# Altium PCB zhuanjie.PcbDoc
Units mm, origin at the board's own origin, x right, y up, seen from the top; angles counter-clockwise.
Board outline 37.21 x 32 mm, 2 copper layers (Top Layer, Bottom Layer); 14 components, 57 nets, 120 pads, 4 vias.
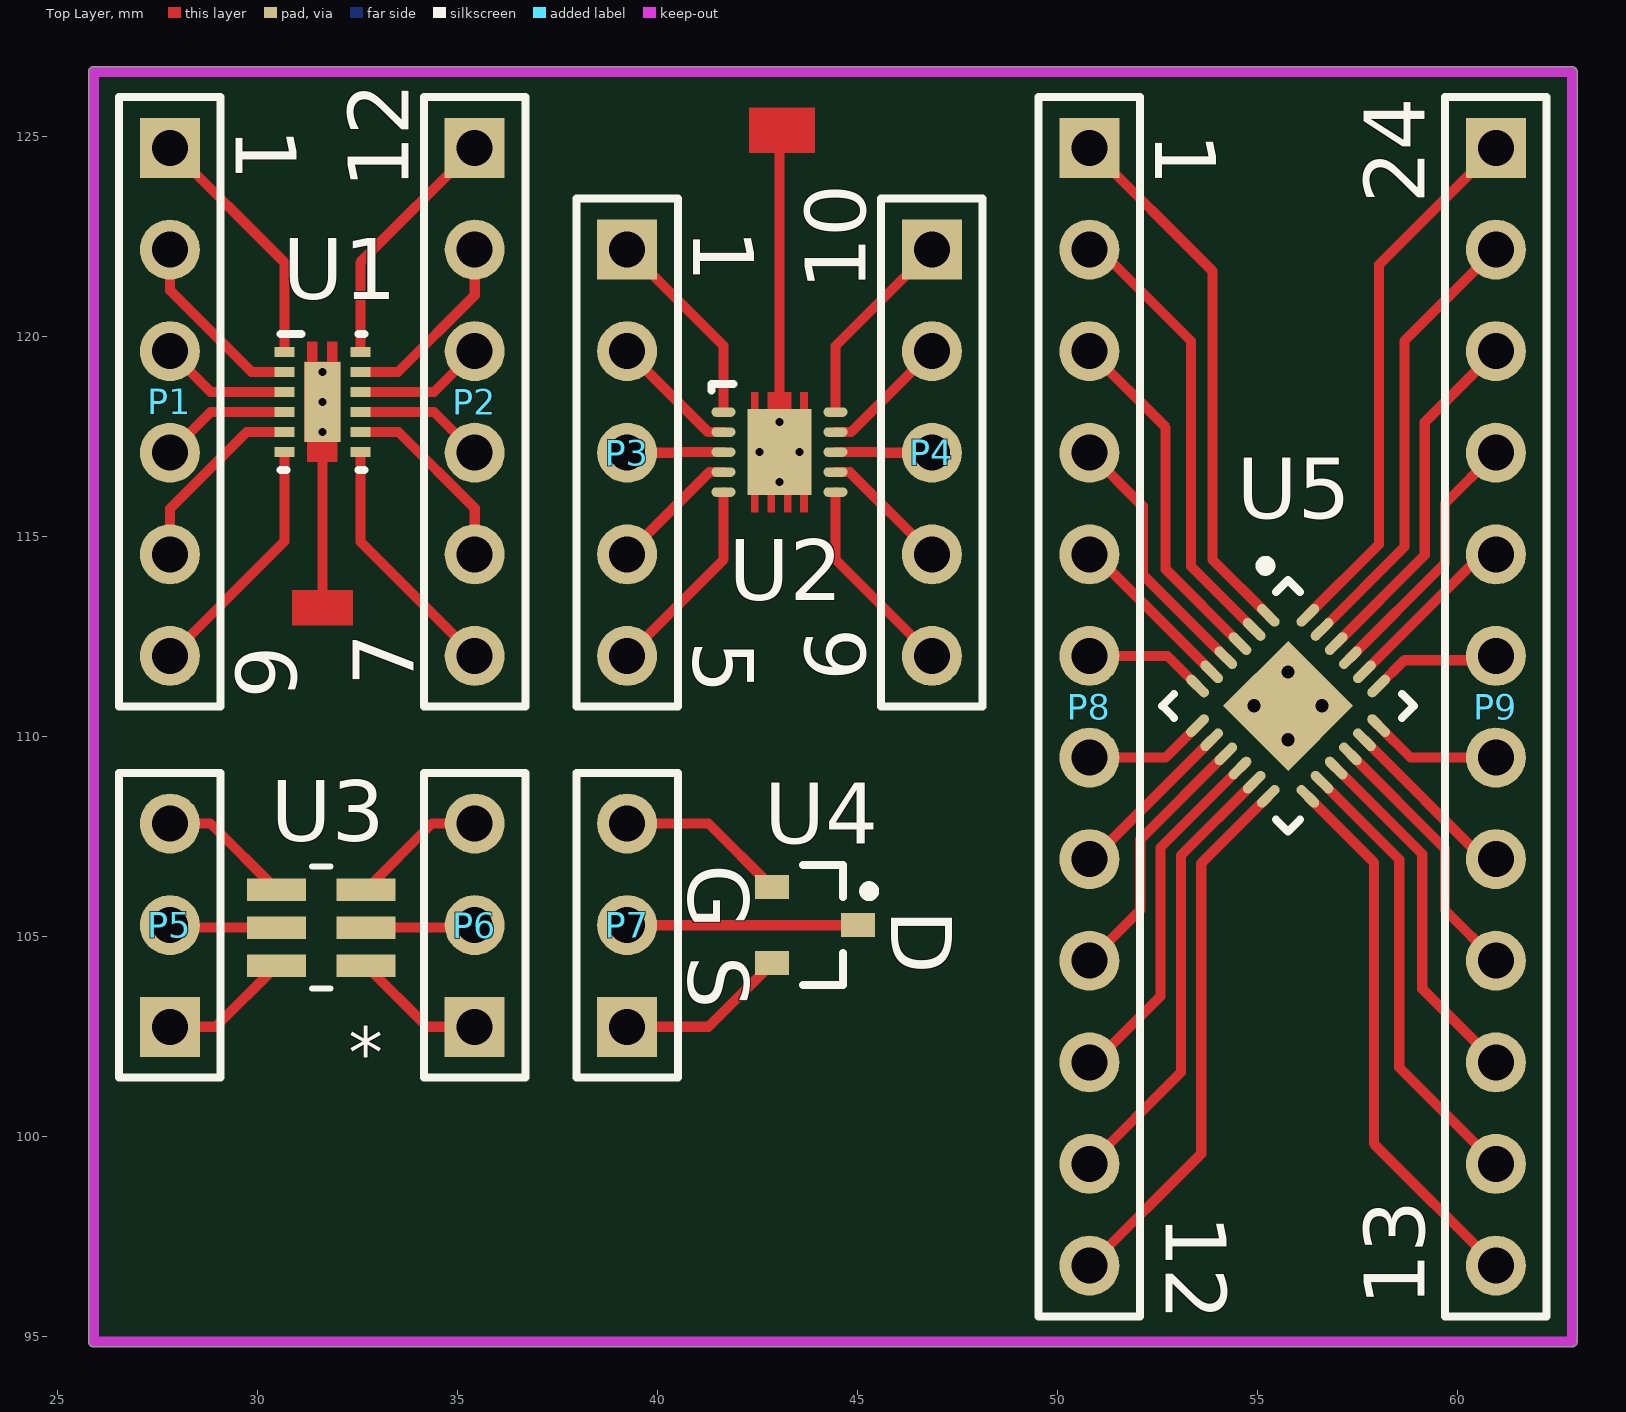
[diagram p0: Top Layer view]
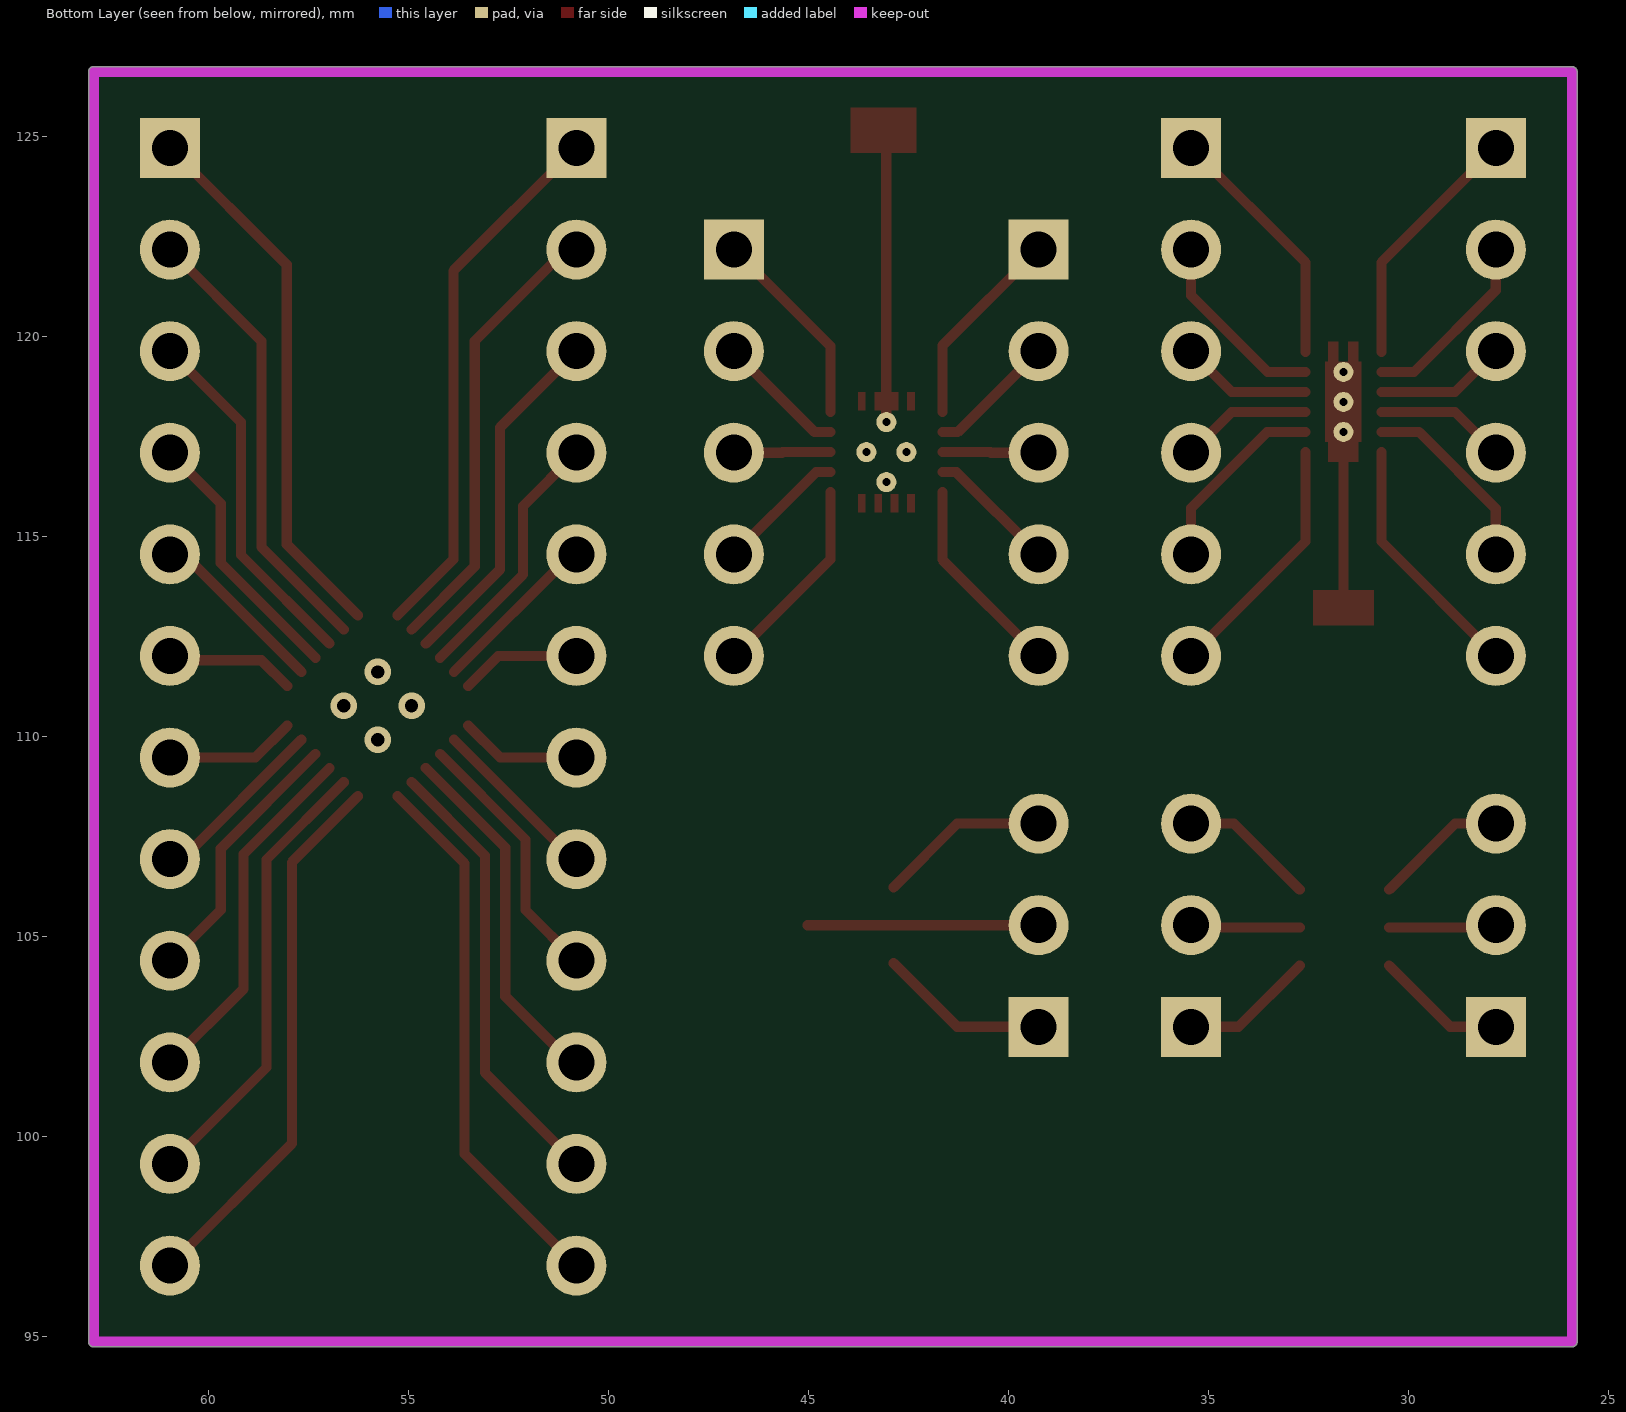
[diagram p1: Bottom Layer view, seen from below]

## Layer stack, top to bottom
Top Solder: solder mask 0.0102, Solder Resist, Dk 3.5
Top Layer: signal copper 0.0356
Dielectric 1: dielectric 0.32, FR-4, Dk 4.8
Bottom Layer: signal copper 0.0356
Bottom Solder: solder mask 0.0102, Solder Resist, Dk 3.5

## Board outline
25.781,94.869 25.781,126.619 cw(c25.908,126.619) 25.908,126.746 62.865,126.746 cw(c62.865,126.619) 62.992,126.619 62.992,94.869 cw(c62.865,94.869) 62.865,94.742 25.908,94.742 cw(c25.908,94.869)

## Design rules (kind name [scope] priority, off if disabled: settings)
Clearance [All] p1 off: gap=0.254 ignorepadtopadclearanceinfootprint=FALSE except(0: Arc-Hole Track-Hole SMDPad-Hole THPad-Hole Via-Hole Fill-Hole Poly-Hole Region-Hole Text-Hole)
ComponentClearance [All] p1 off: gap=0.15 collisioncheckmode=3 verticalgap=0.254 showdistances=FALSE
PolygonConnect [All] p1: connectstyle=Relief reliefconductorwidth=0.254 reliefentries=4 polygonreliefangle="90 Angle" airgapwidth=0.254
RoutingVias [All] p1: holewidth=0.711 width=1.27 viastyle="Through Hole" minholewidth=0.711 minwidth=1.27 maxholewidth=0.711 maxwidth=1.27
SolderMaskExpansion [All] p1: expansion=0.102
Width [All] p1: maxlimit=0.254 minlimit=0.254 preferedwidth=0.254
29 further rules are at their usual default settings.

## Components (designator, comment, footprint, x,y, rotation, side; value= is the part's Value field where it differs from the comment)
P1 "" HDR1X6 27.813,124.714 r270 top
P2 "" HDR1X6 35.433,124.714 r270 top
P3 "" HDR1X5 39.243,122.174 r270 top
P4 "" HDR1X5 46.863,122.174 r270 top
P5 "" HDR1X3 27.813,102.743 r90 top
P6 "" HDR1X3 35.433,102.743 r90 top
P7 "" HDR1X3 39.243,102.743 r90 top
P8 "" HDR1X12 50.8,124.714 r270 top
P9 "" HDR1X12 60.96,124.714 r270 top
U1 "" ?#1 31.623,118.364 r0 top
U2 "" ?#2 43.05,117.11 r0 top
U3 "" DBV6 31.598,105.222 r180 top
U4 "" SOT23_L 43.942,105.283 r0 top
U5 "" QFN24_4X4_L 55.766,110.767 r315 top

## Footprints (in the part's own frame and the unit in brackets; to place one, negate y for a bottom-side part, rotate by r counter-clockwise, add the part's x,y. Pads: shape width x height; smd on the part's side, far side on the other; paste and mask are expansions set on the pad)
DBV6 [mil]
  rect 58x22 smd: 1(-44,37.4) 2(-44,0) 3(-44,-37.4) 4(44,-37.4) 5(44,0) 6(44,37.4)
  silkscreen extent -9,-60 9,60
HDR1X3 [mm] "Connector; Header; 3 Position"
  rect 1.5x1.5 hole 0.9: 1(0,0)
  round 1.5 hole 0.9: 2(2.54,0) 3(5.08,0)
  silkscreen extent -1.27,-1.27 6.35,1.27
HDR1X5 [mm] "Connector; Header; 5 Position"
  rect 1.5x1.5 hole 0.9: 1(0,0)
  round 1.5 hole 0.9: 2(2.54,0) 3(5.08,0) 4(7.62,0) 5(10.16,0)
  silkscreen extent -1.27,-1.27 11.43,1.27
HDR1X6 [mm] "Connector; Header; 6 Position"
  rect 1.5x1.5 hole 0.9: 1(0,0)
  round 1.5 hole 0.9: 2(2.54,0) 3(5.08,0) 4(7.62,0) 5(10.16,0) 6(12.7,0)
  silkscreen extent -1.27,-1.27 13.97,1.27
HDR1X12 [mm] "Connector; Header; 12 Position"
  rect 1.5x1.5 hole 0.9: 1(0,0)
  round 1.5 hole 0.9: 2(2.54,0) 3(5.08,0) 4(7.62,0) 5(10.16,0) 6(12.7,0) 7(15.24,0) 8(17.78,0) 9(20.32,0) 10(22.86,0) 11(25.4,0) 12(27.94,0)
  silkscreen extent -1.27,-1.27 29.21,1.27
QFN24_4X4_L [mm] "QFN, 24-Leads, Body 4x4mm, Pitch 0.5mm, IPC High Density"
  oval 0.7x0.25 smd: 1(-1.95,1.25) 2(-1.95,0.75) 3(-1.95,0.25) 4(-1.95,-0.25) 5(-1.95,-0.75) 6(-1.95,-1.25) 13(1.95,-1.25) 14(1.95,-0.75) 15(1.95,-0.25) 16(1.95,0.25) 17(1.95,0.75) 18(1.95,1.25)
  oval 0.25x0.7 smd: 7(-1.25,-1.95) 8(-0.75,-1.95) 9(-0.25,-1.95) 10(0.25,-1.95) 11(0.75,-1.95) 12(1.25,-1.95) 19(1.25,1.95) 20(0.75,1.95) 21(0.25,1.95) 22(-0.25,1.95) 23(-0.75,1.95) 24(-1.25,1.95)
  rect 2.3x2.3 smd: 25(0,0)
  silkscreen extent -3,-2.23 2.23,2.23, body extent -2.07,-2.07 2.07,2.07, height 1
SOT23_L [mm] "SOT23, 3-Leads, Body 2.9x1.3mm, Pitch 0.95mm, Lead Span 2.3mm - Reverse Pinning, IPC High Density"
  rect 0.85x0.6 smd: 1(1.075,0) 2(-1.075,-0.95) 3(-1.075,0.95)
  silkscreen extent -0.3,-1.5 1.48,1.5, body extent -0.7,-1.5 0.7,1.5, height 1.1
?#1 [mm]
  rect 0.5x0.25 smd paste+0 mask+0.051: 1(-0.95,1.25) 2(-0.95,0.75) 3(-0.95,0.25) 4(-0.95,-0.25) 5(-0.95,-0.75) 6(-0.95,-1.25) 7(0.95,-1.25) 8(0.95,-0.75) 9(0.95,-0.25) 10(0.95,0.25) 11(0.95,0.75) 12(0.95,1.25)
  rect 0.9x2 smd paste-0.45 mask+0.051: 13(0,0)
  round 0.5 / inner round 1.524 / far side round 0.5 hole 0.203 mask+0.051: V(0,-0.75) V(0,0) V(0,0.75)
  Top Layer region: -0.125,-1.5 -0.375,-1.5 -0.375,-1 -0.45,-1 -0.45,1 -0.375,1 -0.375,1.5 -0.125,1.5 -0.125,1 0.125,1 0.125,1.5 0.375,1.5 0.375,1 0.45,1 0.45,-1 0.375,-1 0.375,-1.5 0.125,-1.5 0.125,-1 -0.125,-1
  silkscreen extent -1.05,-1.7 1.05,1.7
?#2 [mm]
  oval 0.6x0.24 smd paste-0.102 mask+0.051: 1(-1.4,1) 2(-1.4,0.5) 3(-1.4,0) 4(-1.4,-0.5) 5(-1.4,-1) 6(1.4,-1) 7(1.4,-0.5) 8(1.4,0) 9(1.4,0.5) 10(1.4,1)
  rect 1.6x2.15 smd paste-0.825 mask+0.051: 11(0,0)
  round 0.5 / inner round 1.524 / far side round 0.5 hole 0.2 mask+0.051: V(-0.5,0) V(0,-0.75) V(0,0.75) V(0.5,0)
  Top Layer region: 0.705,-1.5 0.705,-1.05 0.525,-1.05 0.525,-1.5
  Top Layer region: 0.295,-1.5 0.295,-1.05 0.115,-1.05 0.115,-1.5
  Top Layer region: -0.115,-1.5 -0.115,-1.05 -0.295,-1.05 -0.295,-1.5
  Top Layer region: -0.525,-1.5 -0.525,-1.05 -0.705,-1.05 -0.705,-1.5
  Top Layer region: -0.525,1.05 -0.525,1.5 -0.705,1.5 -0.705,1.05
  Top Layer region: -0.115,1.05 -0.115,1.5 -0.295,1.5 -0.295,1.05
  Top Layer region: 0.295,1.05 0.295,1.5 0.115,1.5 0.115,1.05
  Top Layer region: 0.705,1.05 0.705,1.5 0.525,1.5 0.525,1.05
  silkscreen extent -1.7,1.54 -1.15,1.7

## Via types
v1: diameter 0.66, hole 0.33, Top Layer to Bottom Layer, tented top, 4 vias

## Nets (pads, with @x,y where several pads share a name; then routed paths per layer and width w, separated by ;. In a path a pad name is that pad's centre, name@x,y a point inside that pad or via, vN(x,y) a via of type N, cw(c..) or ccw(c..) an arc to the next point about the centre after c; other vN are vias at no path point)
U1-1: P1.1 U1.1 | length 6.3
  Top Layer w0.254: P1.1 30.673,121.854 U1.1
U1-2: P1.2 U1.2 | length 4.7
  Top Layer w0.254: P1.2 27.813,121.158 29.857,119.114 U1.2
U1-3: P1.3 U1.3 | length 3.3
  Top Layer w0.254: P1.3 28.833,118.614 U1.3
U1-4: P1.4 U1.4 | length 3.3
  Top Layer w0.254: P1.4 28.833,118.114 U1.4
U1-5: P1.5 U1.5 | length 4.8
  Top Layer w0.254: P1.5 27.813,115.697 29.73,117.614 U1.5
U1-6: P1.6 U1.6 | length 6.3
  Top Layer w0.254: P1.6 30.673,114.874 U1.6
U1-7: P2.6 U1.7 | length 6.3
  Top Layer w0.254: U1.7 32.573,114.874 P2.6
U1-8: P2.5 U1.8 | length 4.8
  Top Layer w0.254: U1.8 33.528,117.614 35.433,115.709 P2.5
U1-9: P2.4 U1.9 | length 3.3
  Top Layer w0.254: U1.9 34.413,118.114 P2.4
U1-10: P2.3 U1.10 | length 3.3
  Top Layer w0.254: U1.10 34.413,118.614 P2.3
U1-11: P2.2 U1.11 | length 4.8
  Top Layer w0.254: U1.11 33.516,119.114 35.433,121.031 P2.2
U1-12: P2.1 U1.12 | length 6.3
  Top Layer w0.254: U1.12 32.573,121.854 P2.1
U1-PAD: U1.13 U1.V | length 5.1
  Top Layer w0.254: 31.623,113.284 U1.V@31.623,117.614 ; U1.13 U1.V@31.623,119.114
U2-1: P3.1 U2.1 | length 5.1
  Top Layer w0.254: P3.1 41.65,119.767 U2.1
U2-2: P3.2 U2.2 | length 3.2
  Top Layer w0.254: P3.2 41.267,117.61 U2.2
U2-3: P3.3 U2.3 | length 2.4
  Top Layer w0.254: P3.3 40.437,117.094 40.453,117.11 U2.3
U2-4: P3.4 U2.4 | length 3.3
  Top Layer w0.254: P3.4 41.299,116.61 U2.4
U2-5: P3.5 U2.5 | length 5.1
  Top Layer w0.254: P3.5 41.65,114.421 U2.5
U2-6: P4.5 U2.6 | length 5.1
  Top Layer w0.254: U2.6 44.45,114.427 P4.5
U2-7: P4.4 U2.7 | length 3.3
  Top Layer w0.254: U2.7 44.807,116.61 P4.4
U2-8: P4.3 U2.8 | length 2.4
  Top Layer w0.254: U2.8 45.644,117.11 45.66,117.094 P4.3
U2-9: P4.2 U2.9 | length 3.3
  Top Layer w0.254: U2.9 44.839,117.61 P4.2
U2-10: P4.1 U2.10 | length 5.1
  Top Layer w0.254: U2.10 44.45,119.761 P4.1
U2-PAD: U2.11 U2.V | length 6.9
  Top Layer w0.254: U2.V@43.05,117.86 43.053,117.863 43.053,124.714
U3-1: P6.1 U3.1 | length 3.4
  Top Layer w0.254: U3.1 34.244,102.743 P6.1
U3-2: P6.2 U3.2 | length 2.7
  Top Layer w0.254: U3.2 35.372,105.222 P6.2
U3-3: P6.3 U3.3 | length 3.4
  Top Layer w0.254: U3.3 34.366,107.823 P6.3
U3-4: P5.3 U3.4 | length 3.4
  Top Layer w0.254: P5.3 28.829,107.823 U3.4
U3-5: P5.2 U3.5 | length 2.7
  Top Layer w0.254: P5.2 27.874,105.222 U3.5
U3-6: P5.1 U3.6 | length 3.3
  Top Layer w0.254: P5.1 28.951,102.743 U3.6
U4-1: P7.2 U4.1 | length 5.8
  Top Layer w0.254: P7.2 U4.1
U4-2: P7.1 U4.2 | length 4.3
  Top Layer w0.254: P7.1 41.277,102.743 U4.2
U4-3: P7.3 U4.3 | length 4.3
  Top Layer w0.254: P7.3 41.277,107.823 U4.3
U5-1: P8.1 U5.1 | length 13.5
  Top Layer w0.254: P8.1 53.874,121.64 53.874,114.427 U5.1
U5-2: P8.2 U5.2 | length 11.4
  Top Layer w0.254: P8.2 51.054,122.174 53.34,119.888 53.34,114.254 U5.2
U5-3: P8.3 U5.3 | length 8.9
  Top Layer w0.254: P8.3 52.705,117.729 52.705,114.182 U5.3
U5-4: P8.4 U5.4 | length 6.5
  Top Layer w0.254: P8.4 52.134,115.76 52.134,114.046 U5.4
U5-5: P8.5 U5.5 | length 4.3
  Top Layer w0.254: P8.5 50.919,114.554 U5.5
U5-6: P8.6 U5.6 | length 3
  Top Layer w0.254: P8.6 52.751,112.014 U5.6
U5-7: P8.7 U5.7 | length 3
  Top Layer w0.254: P8.7 52.705,109.474 U5.7
U5-8: P8.8 U5.8 | length 4.3
  Top Layer w0.254: P8.8 50.872,106.934 U5.8
U5-9: P8.9 U5.9 | length 6.6
  Top Layer w0.254: P8.9 52.07,105.664 52.07,107.425 U5.9
U5-10: P8.10 U5.10 | length 9
  Top Layer w0.254: P8.10 50.927,101.854 52.578,103.505 52.578,107.226 U5.10
U5-11: P8.11 U5.11 | length 11.2
  Top Layer w0.254: P8.11 53.086,101.6 53.086,107.027 U5.11
U5-12: P8.12 U5.12 | length 13.6
  Top Layer w0.254: P8.12 53.594,99.568 53.594,106.827 U5.12
U5-13: P9.12 U5.13 | length 13.7
  Top Layer w0.254: U5.13 57.912,106.854 57.912,99.822 P9.12
U5-14: P9.11 U5.14 | length 11.3
  Top Layer w0.254: U5.14 58.547,106.926 58.547,101.727 P9.11
U5-15: P9.10 U5.15 | length 9
  Top Layer w0.254: U5.15 59.119,107.061 59.119,103.695 P9.10
U5-16: P9.9 U5.16 | length 6.7
  Top Layer w0.254: U5.16 59.69,107.197 59.69,105.664 P9.9
U5-17: P9.8 U5.17 | length 4.5
  Top Layer w0.254: U5.17 60.66,106.934 P9.8
U5-18: P9.7 U5.18 | length 3.3
  Top Layer w0.254: U5.18 58.827,109.474 P9.7
U5-19: P9.6 U5.19 | length 3.2
  Top Layer w0.254: U5.19 58.674,111.907 60.853,111.907 P9.6
U5-20: P9.5 U5.20 | length 4.5
  Top Layer w0.254: U5.20 60.613,114.554 P9.5
U5-21: P9.4 U5.21 | length 6.6
  Top Layer w0.254: U5.21 59.69,114.338 59.69,115.824 P9.4
U5-22: P9.3 U5.22 | length 9
  Top Layer w0.254: U5.22 59.182,114.537 59.182,117.856 P9.3
U5-23: P9.2 U5.23 | length 11.3
  Top Layer w0.254: U5.23 58.674,114.736 58.674,119.888 P9.2
U5-24: P9.1 U5.24 | length 13.6
  Top Layer w0.254: U5.24 58.039,114.808 58.039,121.793 P9.1
pads on no net: U5.25
copper on no net:
  other v1: 55.766,109.919 54.917,110.767 56.615,110.767 55.766,111.616

## Keep-outs
Keep-Out Layer:
  lines w0.254: 177.292,126.746 177.419,126.619 ; 25.908,94.869 25.908,126.619 62.865,126.619 62.865,94.869 25.908,94.869

## Other copper
Top Layer:
  rectangle net U2-PAD: 42.291,124.587 43.942,125.73
  rectangle net U1-PAD: 30.861,112.776 32.385,113.665

## Silkscreen, mask and mechanical layers (free items; w line width, h text height)
Top Overlay:
  text "1" at 29.464,125.222 h1.52 r270
  text "1" at 52.451,125.095 h1.52 r270
  text "12" at 33.782,123.698 h1.52 r90
  text "24" at 59.182,123.317 h1.52 r90
  text "1" at 40.894,122.682 h1.52 r270
  text "10" at 45.212,121.158 h1.52 r90
  text "5" at 40.894,112.395 h1.52 r270
  text "6" at 29.464,112.268 h1.52 r270
  text "6" at 45.212,111.379 h1.52 r90
  text "7" at 33.909,111.252 h1.52 r90
  text "G" at 40.767,106.807 h1.52 r270
  text "D" at 45.847,105.664 h1.52 r270
  text "S" at 40.767,104.521 h1.52 r270
  text "12" at 52.705,98.044 h1.52 r270
  text "13" at 59.182,95.758 h1.52 r90
Top Paste:
  rectangle: 42.291,124.587 43.942,125.73
  rectangle: 30.861,112.776 32.385,113.665
Mechanical 1:
  lines w0.254: 25.908,100.965 48.641,100.965 ; 25.908,109.855 48.768,109.855 48.514,109.855 ; 37.338,101.092 37.338,126.619 ; 48.768,95.123 48.768,126.619

## Dimensions
62.865,126.619 to 62.865,94.869 on Top Paste
25.908,126.619 to 62.865,126.619 on Top Paste

## Text inside footprints (layer, text, board x,y; h text height)
U3: Top Overlay "*" at 33.147,103.251 h1.27 r180